# EAGLE board auxboxshield1.5 (EAGLE 6.5.0)
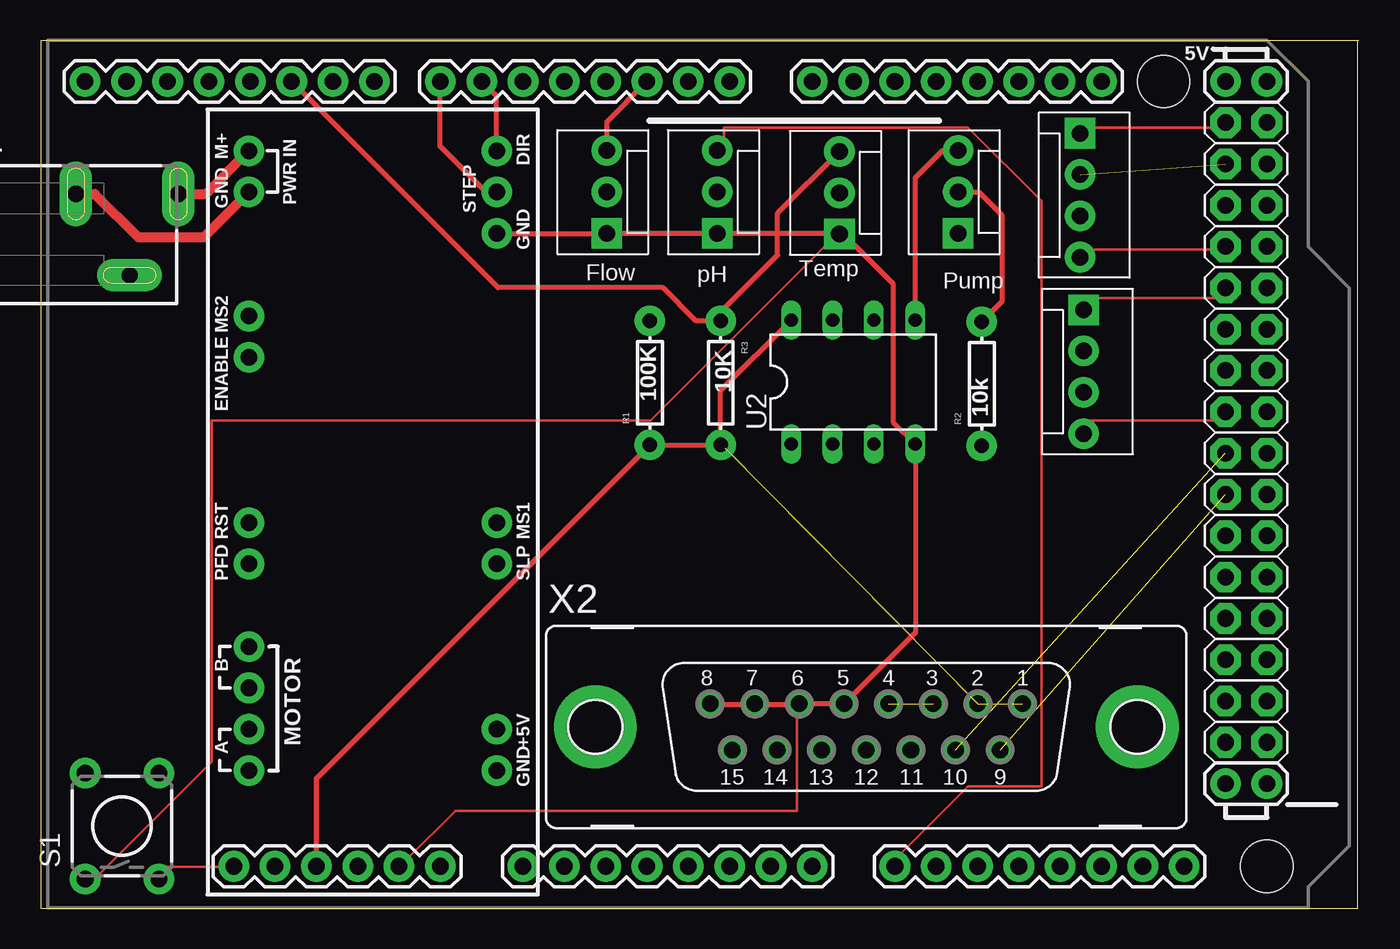
[diagram p0: board, top side]
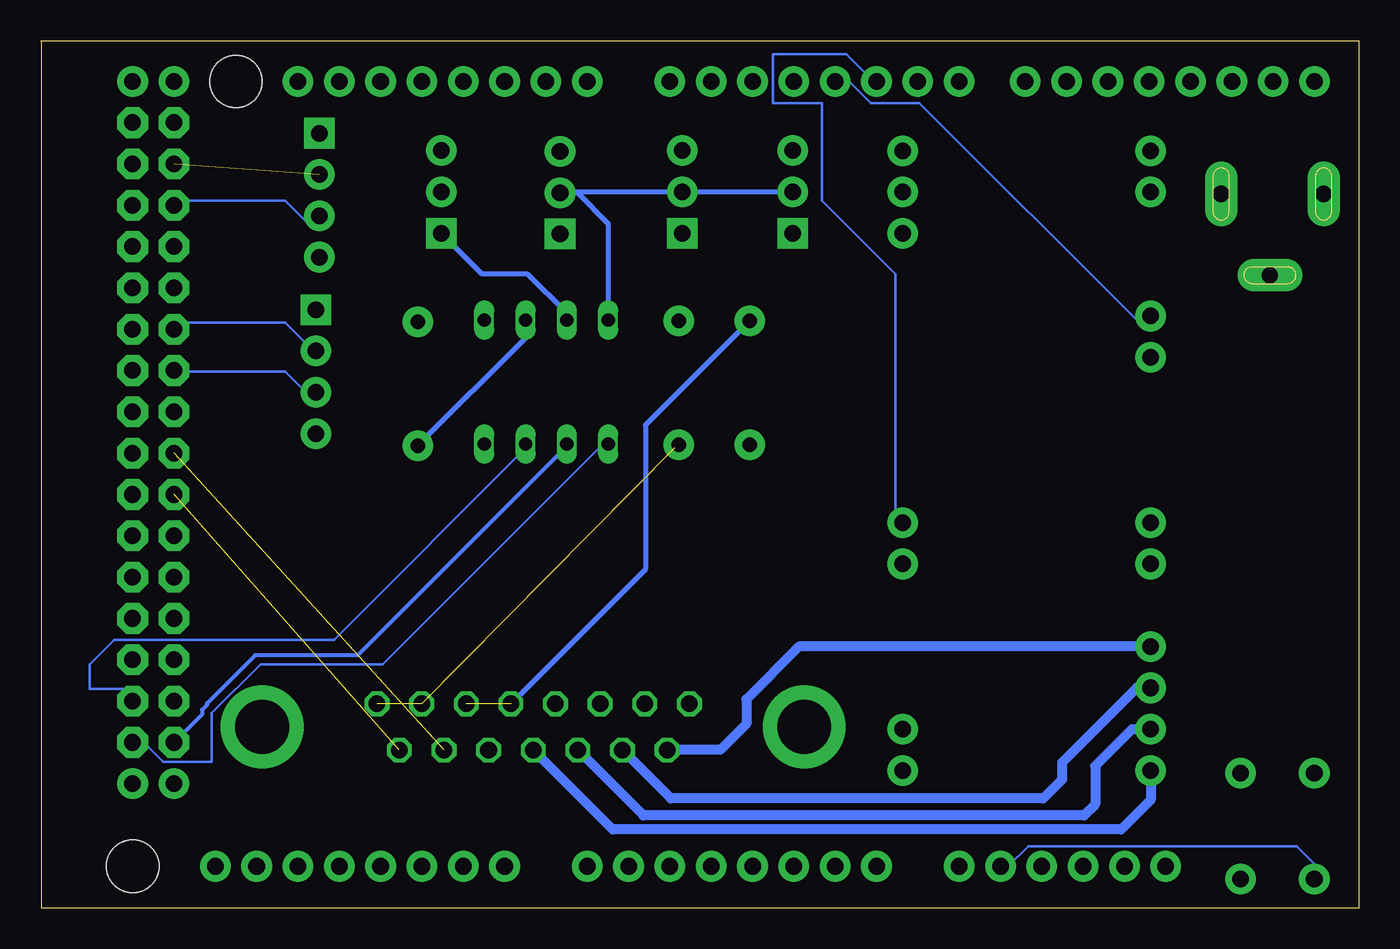
[diagram p1: board, bottom side, seen from below]

Size 81.03 x 53.34 mm. Coordinates in mm from the lower left corner, seen from the top.
Outline: 80.95,53.33 80.95,0 0,0 0,53.33
Outline: 81.03,53.34 0,53.34
Copper layers (1*16): Top 0.0356mm / dielectric 1.5011mm / Bottom 0.0356mm
Design rules "LaenPCBOrder (1)": minimum track width 6mil, minimum drill 13mil, track to track 6mil, track to pad 6mil, pad to pad 6mil, via to via 6mil, smd to smd 6mil, copper to edge 15mil, drill to drill 6mil, minimum pad ring 7mil, minimum via ring 7mil, stop-mask expansion 3mil, vias tented up to drill 0mil, thermal gap 10mil

## Footprints (pad centres in the part's own frame; a part is rotated, then mirrored left to right if it is on the bottom)
ARDUINO_MEGA_SHIELD = drill 1.016 pad 1.88: 0 19.05,27.94; 1 16.51,27.94; 2 13.97,27.94; 3 11.43,27.94; 3.3V -8.89,-20.32; 4 8.89,27.94; 5 6.35,27.94; 5V@0 -6.35,-20.32; 5V@1 49.53,27.94; 5V@2 52.07,27.94; 6 3.81,27.94; 7 1.27,27.94; 8 -2.794,27.94; 9 -5.334,27.94; 10 -7.874,27.94; 11 -10.414,27.94; 12 -12.954,27.94; 13 -15.494,27.94; 14 24.13,27.94; 15 26.67,27.94; 16 29.21,27.94; 17 31.75,27.94; 18 34.29,27.94; 19 36.83,27.94; 20 39.37,27.94; 21 41.91,27.94; A0 6.35,-20.32; A1 8.89,-20.32; A2 11.43,-20.32; A3 13.97,-20.32; A4 16.51,-20.32; A5 19.05,-20.32; A6 21.59,-20.32; A7 24.13,-20.32; A8 29.21,-20.32; A9 31.75,-20.32; A10 34.29,-20.32; A11 36.83,-20.32; A12 39.37,-20.32; A13 41.91,-20.32; A14 44.45,-20.32; A15 46.99,-20.32; AREF -20.574,27.94; GND@0 -3.81,-20.32; GND@1 -1.27,-20.32; GND@2 49.53,-15.24; GND@3 52.07,-15.24; GND@4 -18.034,27.94; RESET -11.43,-20.32; VIN 1.27,-20.32 | drill 1.016 pad 1.88 octagon: 22 49.53,25.4; 23 52.07,25.4; 24 49.53,22.86; 25 52.07,22.86; 26 49.53,20.32; 27 52.07,20.32; 28 49.53,17.78; 29 52.07,17.78; 30 49.53,15.24; 31 52.07,15.24; 32 49.53,12.7; 33 52.07,12.7; 34 49.53,10.16; 35 52.07,10.16; 36 49.53,7.62; 37 52.07,7.62; 38 49.53,5.08; 39 52.07,5.08; 40 49.53,2.54; 41 52.07,2.54; 42 49.53,0; 43 52.07,0; 44 49.53,-2.54; 45 52.07,-2.54; 46 49.53,-5.08; 47 52.07,-5.08; 48 49.53,-7.62; 49 52.07,-7.62; 50 49.53,-10.16; 51 52.07,-10.16; 52 49.53,-12.7; 53 52.07,-12.7 | hole 3.2: 45.72,27.94; 52.07,-20.32
EASYDRIVER_V44 = drill 1.016 pad 1.88: A1 -16.51,7.62; A2 -13.97,7.62; B1 -8.89,7.62; B2 -11.43,7.62; DIR 21.59,-7.62; ENABLE 8.89,7.62; GND1 19.05,7.62; GND2 16.51,-7.62; GND3 -16.51,-7.62; M+ 21.59,7.62; MS1 -1.27,-7.62; MS2 11.43,7.62; P$11 -13.97,-7.62; PFD -3.81,7.62; RST -1.27,7.62; SLEEP -3.81,-7.62; STEP 19.05,-7.62
MOLEX-1X3 = drill 1.016 pad 1.88 square: 1 0,0 | drill 1.016 pad 1.88: 2 2.54,0; 3 5.08,0
MOLEX-1X4 = drill 1.016 pad 1.88 square: 1 0,0 | drill 1.016 pad 1.88: 2 2.54,0; 3 5.08,0; 4 7.62,0
AXIAL-0.3 = drill 0.9 pad 1.88: P$1 -3.81,0; P$2 3.81,0
TACTILE-PTH-EZ = drill 1.016 pad 1.88: 1 -3.251,2.261; 2 3.251,2.261; 3 -3.251,-2.261; 4 3.251,-2.261
DIL-08 = drill 0.813 long: 1 -3.81,-3.81; 2 -1.27,-3.81; 3 1.27,-3.81; 4 3.81,-3.81; 5 3.81,3.81; 6 1.27,3.81; 7 -1.27,3.81; 8 -3.81,3.81
SCD-014-A = drill 1 pad 2 long: 1 -2.5,13.8; 2 -2.5,7.5; 3 2.5,10.8
F15VP = drill 1.016 octagon: 1 9.601,1.422; 2 6.858,1.422; 3 4.115,1.422; 4 1.372,1.422; 5 -1.372,1.422; 6 -4.115,1.422; 7 -6.858,1.422; 8 -9.601,1.422; 9 8.23,-1.422; 10 5.486,-1.422; 11 2.743,-1.422; 12 0,-1.422; 13 -2.743,-1.422; 14 -5.486,-1.422; 15 -8.23,-1.422 | drill 3.302 pad 5.08: G1 -16.662,0; G2 16.662,0

## Placement (x,y rotation side)
AMSHD1  ARDUINO_MEGA_SHIELD  [ARDUINO_MEGA_SHIELD]  23.3,22.9 0 top
EASYDRIVER_V44  EASYDRIVER_V44  [EASYDRIVER_V44]  20.41,24.98 90 top
JP1  [MOLEX-1X3]  34.8,41.5 90 top
JP2  [MOLEX-1X3]  49.1,41.45 90 top
JP3  [MOLEX-1X3]  56.4,41.5 90 top
JP4  [MOLEX-1X4]  63.9,47.65 270 top
JP5  [MOLEX-1X4]  64.1,36.8 270 top
JP11  [MOLEX-1X3]  41.6,41.5 90 top
R1  100K  [AXIAL-0.3]  37.45,32.3 90 top
R2  10k  [AXIAL-0.3]  57.85,32.25 90 top
R3  10K  [AXIAL-0.3]  41.8,32.3 270 top
S1  SWITCH-MOMENTARY-2PTH_EZ  [TACTILE-PTH-EZ]  5,5.05 90 top
U2  MCP41XXXDIL  [DIL-08]  49.95,32.35 0 top
X1  [SCD-014-A]  -5.33,41.42 270 top
X2  [F15VP]  50.75,11.15 0 top

## Library data of the parts
AMSHD1 = SparkFun-Boards
EASYDRIVER_V44 = EasyDriver
JP1-JP5 JP11 = SparkFun-Connectors
R1 = SparkFun-Resistors; PROD_ID: RES-10686
R2 = SparkFun-Resistors; PROD_ID: RES-12183
R3 = SparkFun-Resistors; PROD_ID: RES-10698
S1 = SparkFun-Electromechanical
U2 = SparkFun-AnalogIC
X1 = con-shiua-chyuan; OC_FARNELL: unknown; OC_NEWARK: unknown
X2 = con-subd; OC_FARNELL: unknown; OC_NEWARK: unknown

## Nets
+5V: AMSHD1.5V@0 JP1.2 JP2.2 JP11.2 R1.P$1 R3.P$2 U2.8 X2.1 X2.2
GND-ISO: AMSHD1.GND@1 EASYDRIVER_V44.GND2 JP1.1 JP2.1 JP11.1 S1.1 U2.4 X2.5 X2.6 X2.7 X2.8
N$1: EASYDRIVER_V44.M+ X1.1
N$2: AMSHD1.36 JP5.4
N$3: AMSHD1.38 X2.10
N$4: R1.P$2 X2.3 X2.4
N$5: AMSHD1.22 JP4.1
N$6: EASYDRIVER_V44.GND1 X1.2
N$7: EASYDRIVER_V44.A1 X2.12
N$8: AMSHD1.24 JP4.2
N$9: AMSHD1.RESET S1.3
N$10: AMSHD1.26 JP4.3
N$11: EASYDRIVER_V44.A2 X2.13
N$12: AMSHD1.53 U2.1
N$13: AMSHD1.5 EASYDRIVER_V44.MS1
N$14: AMSHD1.28 JP4.4
N$15: AMSHD1.A8 JP11.3
N$16: AMSHD1.4 EASYDRIVER_V44.MS2
N$17: AMSHD1.52 U2.2
N$18: AMSHD1.30 JP5.1
N$19: AMSHD1.40 X2.9
N$20: AMSHD1.51 U2.3
N$21: JP3.3 U2.5
N$22: AMSHD1.32 JP5.2
N$23: AMSHD1.34 JP5.3
N$24: R2.P$1 U2.6
N$25: JP3.2 R2.P$2
N$26: AMSHD1.10 JP2.3 R3.P$1
N$27: EASYDRIVER_V44.B2 X2.14
N$28: AMSHD1.2 JP1.3
N$29: AMSHD1.6 EASYDRIVER_V44.DIR
N$30: AMSHD1.7 EASYDRIVER_V44.STEP
N$31: EASYDRIVER_V44.B1 X2.15
N$32: JP3.1 U2.7

## Tracks (layer width: path | path; a pad name or v marks a point on that pad's centre or on a via)
+5V  (2 unrouted)
  Top 0.254: R3.P$2 41.86,28.49 42.05,28.3
  Top 0.305: AMSHD1.5V@0 16.95,7.99 R1.P$1 R3.P$2 41.8,31.82 U2.8
  Bottom 0.305: JP1.2 JP11.2 49.05,44.04 JP2.2 48.04,43.99 46.15,42.1 U2.8
GND-ISO
  Top 0.152: S1.1 3,1.5 10.5,9 10.5,30 37.5,30 49.5,42 JP2.1 | AMSHD1.GND@1 22.5,3 25.5,6 46.5,6 46.5,12 X2.6
  Top 0.305: EASYDRIVER_V44.GND2 JP1.1 JP11.1 49.05,41.5 JP2.1 49.35,41.45 52.4,38.4 52.4,29.9 U2.4 53.76,16.95 X2.5 | X2.8 41.33,12.57 41.35,12.55 43.87,12.55 | 43.87,12.55 46.61,12.55 X2.6 46.73,12.57 46.85,12.6 49.26,12.6 X2.5 | X2.5 49.47,12.57 49.5,12.6 | 43.87,12.55 X2.7
  Bottom 0.152: 21.59,2.54 20.32,3.81 3.81,3.81 2.54,2.54 S1.1
N$1
  Top 0.61: X1.1 10.14,43.92 EASYDRIVER_V44.M+
N$2
  Top 0.152: JP5.4 64.5,30 73.5,30 AMSHD1.36
N$3  (1 unrouted)
N$4  (1 unrouted)
  Bottom 0.305: R1.P$2 43.85,29.7 43.85,20.84 X2.4
N$5
  Top 0.152: JP4.1 64.5,48 72,48 AMSHD1.22
N$6
  Top 0.61: X1.2 3.33,43.92 6,41.25 10.01,41.25 EASYDRIVER_V44.GND1
N$7
  Bottom 0.61: EASYDRIVER_V44.A1 12.79,6.66 14.6,4.85 45.87,4.85 X2.12
N$8  (1 unrouted)
N$9
  Top 0.152: S1.3 7.62,2.54 11.43,2.54 AMSHD1.RESET
N$10
  Bottom 0.152: JP4.3 64.5,42 66,43.5 72,43.5 AMSHD1.26
N$11
  Bottom 0.61: EASYDRIVER_V44.A2 13.94,11.01 16.2,8.75 16.2,6.4 16.9,5.7 43.98,5.7 X2.13
N$12
  Bottom 0.152: U2.1 46.5,28.5 60,15 67.5,15 70.5,12 70.5,9 73.5,9 75,10.5 AMSHD1.53
N$13
  Bottom 0.152: EASYDRIVER_V44.MS1 28.5,24 28.5,39 33,43.5 33,49.5 36,49.5 36,52.5 31.5,52.5 30,51 AMSHD1.5
N$14
  Top 0.152: JP4.4 64.5,40.5 72,40.5 AMSHD1.28
N$15
  Top 0.152: AMSHD1.A8 52.5,3 57,7.5 61.5,7.5 61.5,43.5 57,48 42,48 42,46.5 JP11.3
N$16
  Top 0.152: 12.7,36.83 EASYDRIVER_V44.MS2 13.5,36
  Bottom 0.152: EASYDRIVER_V44.MS2 13.5,36 27,49.5 30,49.5 31.5,51 AMSHD1.4
N$17
  Bottom 0.254: U2.2 48.68,28.42 61.55,15.55 67.85,15.55 70.8,12.6 70.8,12.5 71.1,12.2 71.1,11.93 AMSHD1.52
N$18
  Top 0.152: JP5.1 64.5,37.5 73.5,37.5 AMSHD1.30
N$19  (1 unrouted)
N$20
  Bottom 0.152: U2.3 51,28.5 63,16.5 76.5,16.5 78,15 78,13.5 75,13.5 AMSHD1.51
N$21
  Top 0.305: JP3.3 55.43,46.58 53.75,44.9 U2.5
N$22
  Bottom 0.152: JP5.2 64.5,34.5 66,36 72,36 AMSHD1.32
N$23
  Bottom 0.152: JP5.3 64.5,31.5 66,33 72,33 AMSHD1.34
N$24
  Bottom 0.305: U2.6 51.22,35.07 R2.P$1
N$25
  Top 0.305: JP3.2 57.66,44.04 59.1,42.6 59.1,37.31 R2.P$2
N$26
  Top 0.305: JP2.3 45.3,42.73 45.3,40.15 41.8,36.65 R3.P$1 40.29,36.11 38.25,38.15 28.12,38.15 AMSHD1.10
N$27
  Bottom 0.61: EASYDRIVER_V44.B2 13.65,13.55 18.25,8.95 18.25,7.9 19.4,6.75 42.29,6.75 X2.14
N$28
  Top 0.305: JP1.3 34.8,48.37 AMSHD1.2
N$29
  Top 0.305: EASYDRIVER_V44.DIR 28.03,49.92 AMSHD1.6
N$30
  Top 0.305: EASYDRIVER_V44.STEP 27.37,44.03 24.55,46.85 24.55,50.82 AMSHD1.7
N$31
  Bottom 0.61: EASYDRIVER_V44.B1 34.41,16.09 37.65,12.85 37.65,11.35 39.25,9.75 42.5,9.75 X2.15
N$32
  Bottom 0.305: U2.7 48.68,36.58 51.1,39 53.9,39 JP3.1

## Text on the board
tPlace: Flow | Temp | pH | Pump
DrillLegend_01-16: 01-16